# Altium PCB capbank.PcbDoc
Units mm, origin at the board's own origin, x right, y up, seen from the top; angles counter-clockwise.
Board outline 65 x 40 mm, 2 copper layers (Top Layer, Bottom Layer); 28 components, 20 nets, 75 pads, 23 vias.
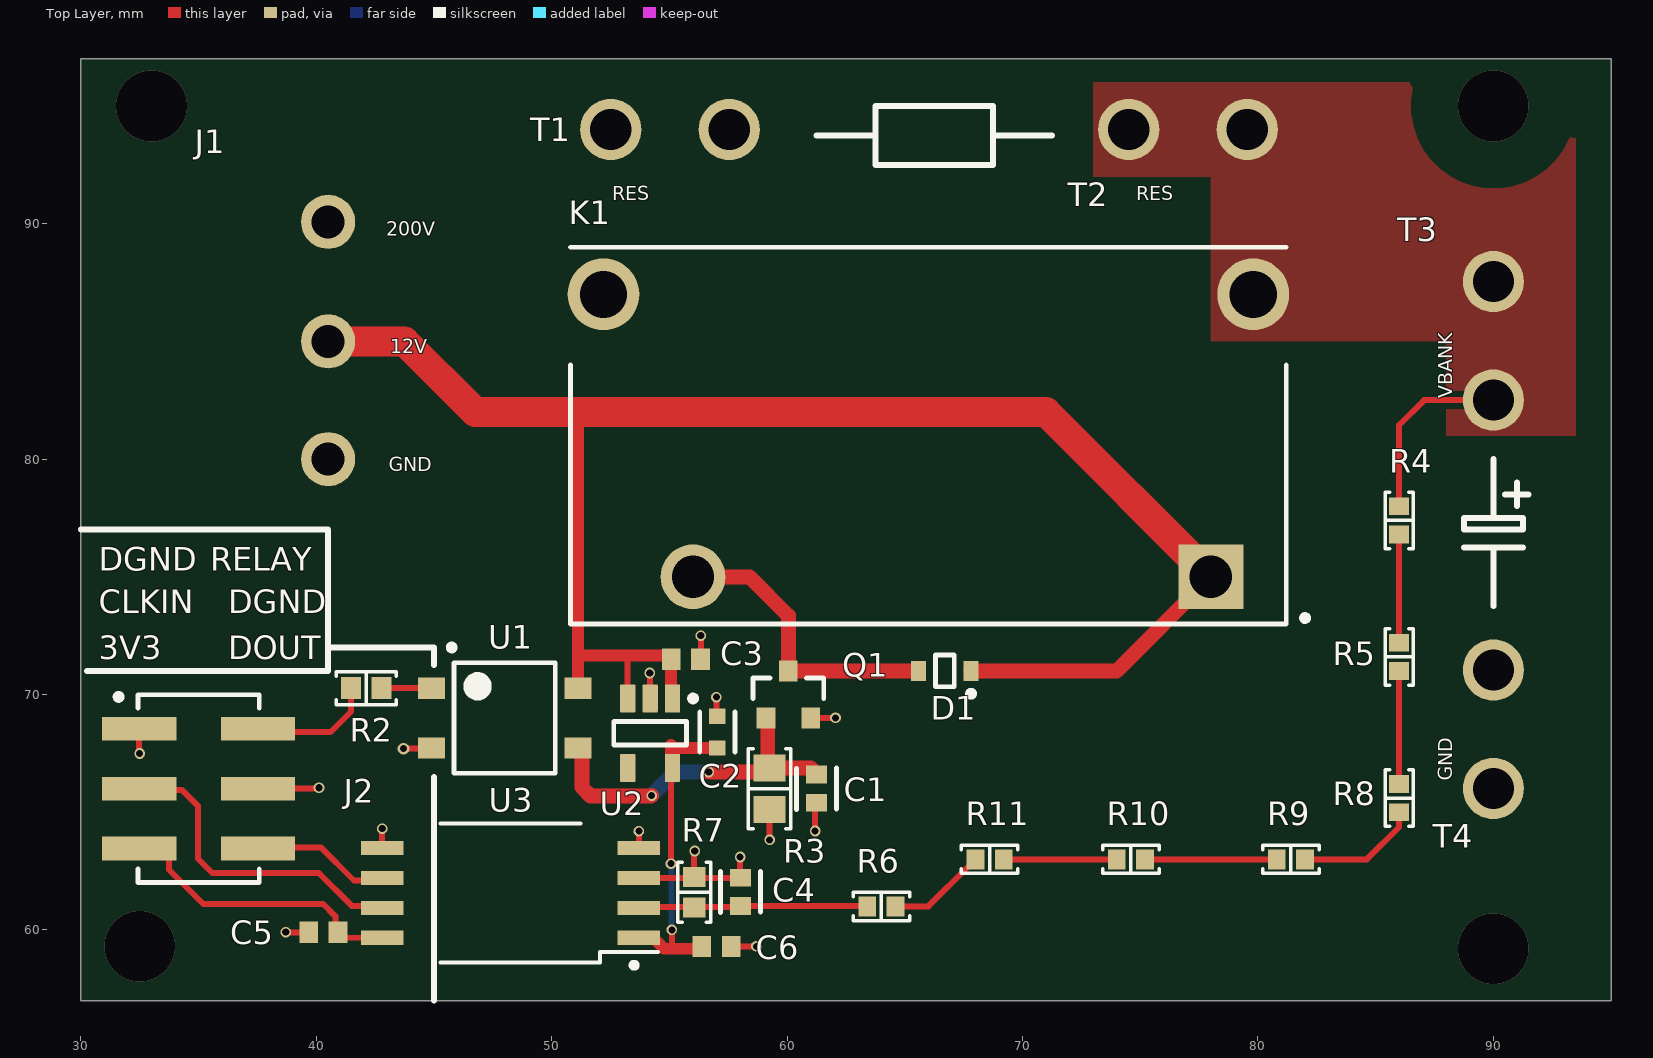
[diagram p0: Top Layer view]
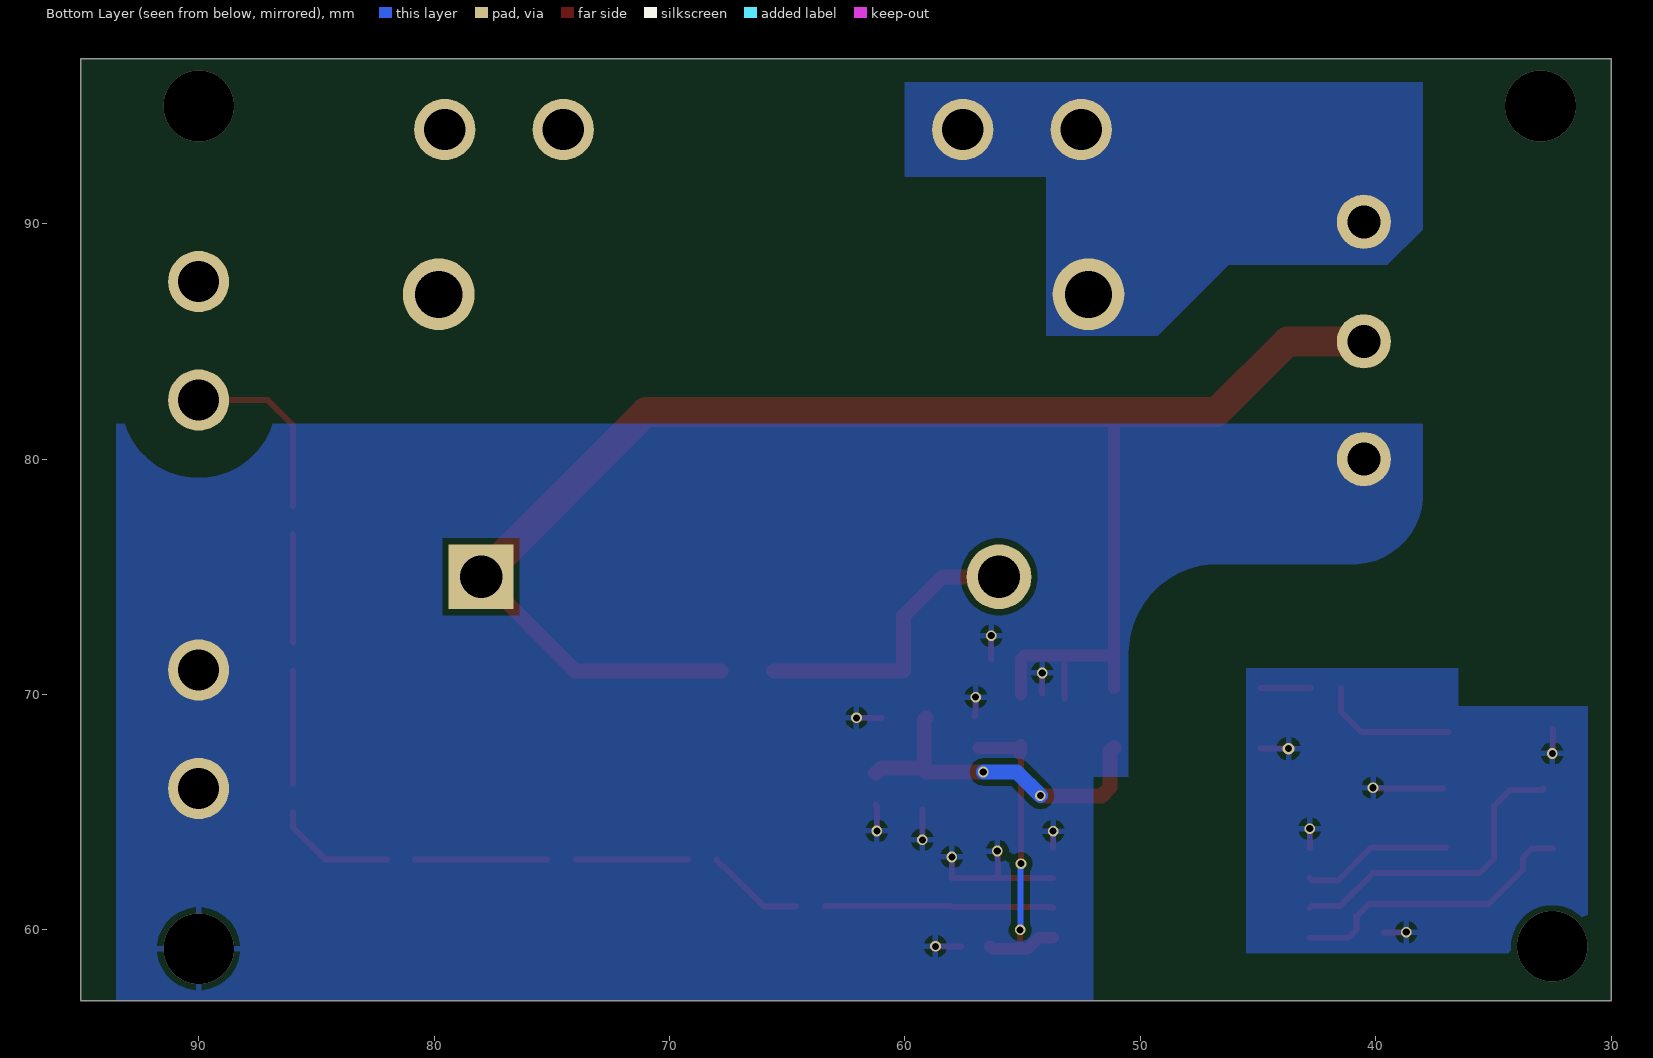
[diagram p1: Bottom Layer view, seen from below]
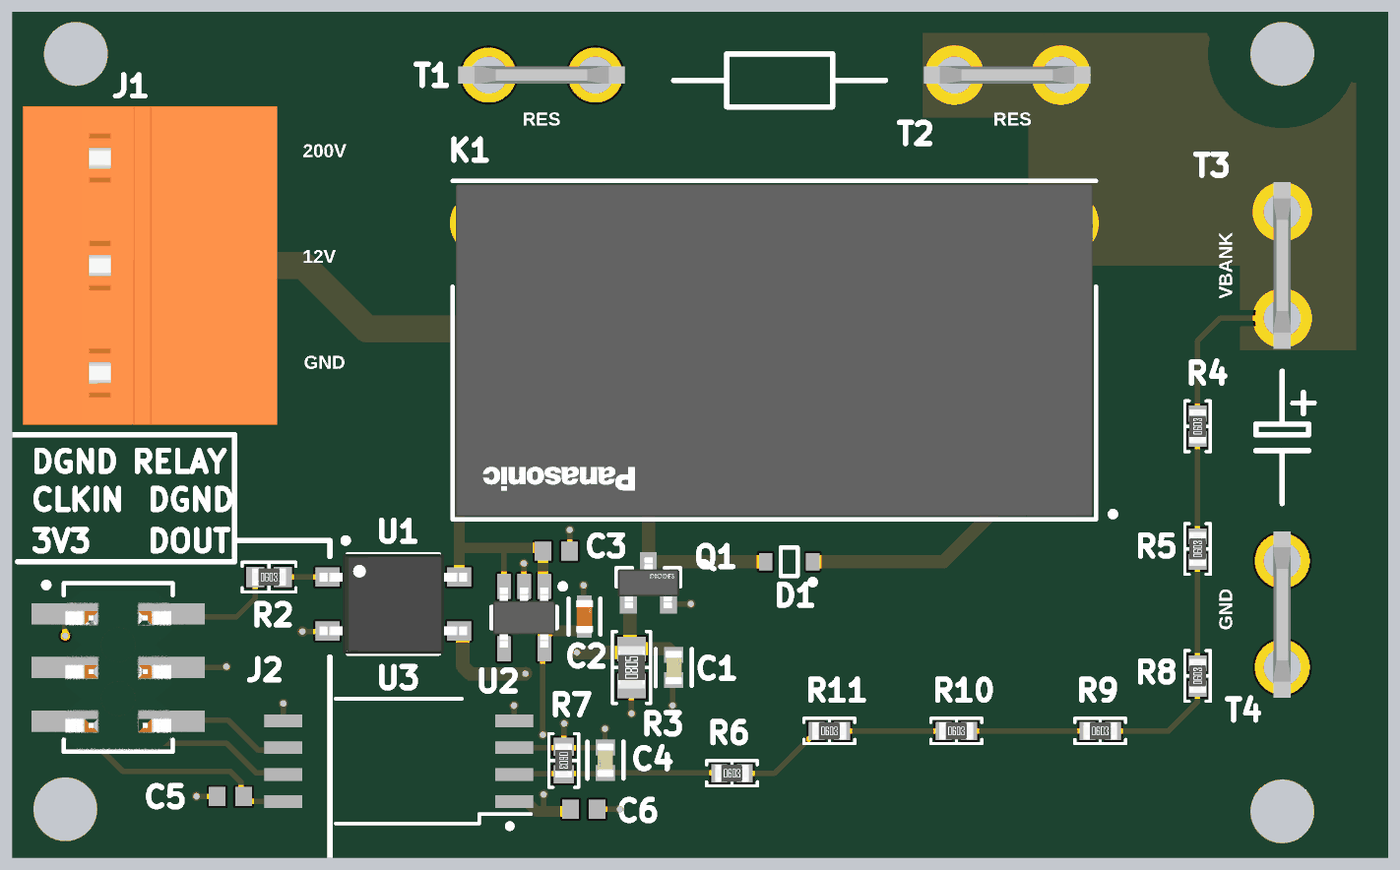
[diagram p2: 3D render of the assembled board from above, using the file's embedded part models]

## Layer stack, top to bottom
Top Solder: solder mask 0.0102, Solder Resist, Dk 3.5
Top Layer: signal copper 0.0356
Dielectric 1: dielectric 0.32, FR-4, Dk 4.8
Bottom Layer: signal copper 0.0356
Bottom Solder: solder mask 0.0102, Solder Resist, Dk 3.5

## Board outline
30,57 95,57 95,97 30,97

## Design rules (kind name [scope] priority, off if disabled: settings)
Clearance hv_clearance [InNetClass('HV') vs Not InNetClass('HV')] p1: gap=2 ignorepadtopadclearanceinfootprint=FALSE
Clearance [All] p2: gap=0.254 ignorepadtopadclearanceinfootprint=FALSE
PolygonConnect [All] p1: connectstyle=Relief reliefconductorwidth=0.254 reliefentries=4 polygonreliefangle="90 Angle" airgapwidth=0.254
RoutingVias [All] p1: holewidth=0.711 width=1.27 viastyle="Through Hole" minholewidth=0.3 minwidth=0.45 maxholewidth=0.711 maxwidth=1.27
SilkToSolderMaskClearance [IsPad] p1: minsilkscreentomaskgap=0.025 clearancetoexposedcopper=TRUE
SolderMaskExpansion [All] p1: expansion=0.102 istentingtop=FALSE
Width [All] p1: maxlimit=2.54 minlimit=0.254 preferedwidth=0.254
29 further rules are at their usual default settings.

## Classes and differential pairs
net class HV: +200 NetK1_3 NetR4_1 NetR5_1 NetR6_2 NetR8_1 NetR9_1 NetR10_1

## Components (designator, comment, footprint, x,y, rotation, side; value= is the part's Value field where it differs from the comment)
C1 "15nF C0G" FP-C0603C-CF-MFG 61.25,66 r270 top value="15,000 pF"
C2 "2.2uF" FP-GRM188-0_1-e0_2_0_5-MFG 57.032,68.407 r90 top
C3 "1uF" CAPC1608X87X35LL15T15 55.7,71.5 r180 top
C4 "15nF C0G" FP-C0603C-CF-MFG 58.019,61.618 r90 top value="15,000 pF"
C5 "1uF" CAPC1608X87X35LL15T15 40.3,59.9 r0 top
C6 "1uF" CAPC1608X87X35LL15T15 57,59.3 r180 top
D1 "BAT54HT1G" ONSC-SOD-323-2-477-02_V 66.7,71 r180 top
J1 "20A Socket 3Pin" weidmuller_3p_20A 40.5,85 r270 top
J2 "M20-8750342" FP-M20-8750342-MFG 35,66 r270 top
K1 "ALF1P12" FP-ALF1P12-MFG 66,81 r180 top
Q1 "DMN6140L-13" FP-SOT23-MFG 60.05,70 r90 top
R2 "510Ohm" "RES 0603_1608" 42.125,70.275 r0 top
R3 "12k" "RES 0805_2012" 59.25,66 r90 top value=1K
R4 "220k" "RES 0603_1608 RF" 86,77.4 r90 top
R5 "220k" "RES 0603_1608 RF" 86,71.6 r90 top
R6 "220k" "RES 0603_1608 RF" 64,61 r0 top
R7 "3.3k" "RES 0603_1608" 56.051,61.605 r270 top
R8 "220k" "RES 0603_1608 RF" 86,65.6 r90 top
R9 "220k" "RES 0603_1608 RF" 81.4,63 r0 top
R10 "220k" "RES 0603_1608 RF" 74.6,63 r0 top
R11 "220k" "RES 0603_1608 RF" 68.6,63 r0 top
T1 "pwr_connector_quick" pcb_quick_power_connector 55,94 r180 top
T2 "pwr_connector_quick" pcb_quick_power_connector 77,94 r180 top
T3 "pwr_connector_quick" pcb_quick_power_connector 90,85 r270 top
T4 "pwr_connector_quick" pcb_quick_power_connector 90,68.5 r270 top
U1 "SFH690BT" VISH-SOP-4_A_V 48,69 r0 top
U2 "TPS76150DBVR" DBV0005A_M 54.178,68.358 r270 top
U3 "AMC1336DWV" AMC1336 48,62 r180 top

## Footprints (in the part's own frame and the unit in brackets; to place one, negate y for a bottom-side part, rotate by r counter-clockwise, add the part's x,y. Pads: shape width x height; smd on the part's side, far side on the other; paste and mask are expansions set on the pad)
AMC1336 [mm]
  rect 1.8x0.6 smd paste+0 mask+0: 1(-5.704,2.332) 2(-5.704,1.062) 3(-5.704,-0.208) 4(-5.704,-1.478) 5(5.196,-1.478) 6(5.196,-0.208) 7(5.196,1.062) 8(5.196,2.332)
  silkscreen extent -6.5,-2.52 2.72,3.38, body extent -4,-2.5 3.5,3.4, height 1.54
CAPC1608X87X35LL15T15 [mm] "Chip Capacitor, 2-Leads, Body 1.60x0.80mm, IPC High Density"
  rect 0.8x0.9 smd: 1(-0.625,0) 2(0.625,0)
  body extent -0.87,-0.48 0.87,0.48, height 0.87
DBV0005A_M [mm] "SOT23, 5-Leads, Body 3.05x1.75mm, Pitch 0.95mm, IPC Low Density"
  rrect15% 1.2x0.65 smd: 1(-1.475,0.95) 2(-1.475,0) 3(-1.475,-0.95) 4(1.475,-0.95) 5(1.475,0.95)
  silkscreen extent -1.6,-1.55 0.5,1.95, body extent -1.42,-1.46 1.42,1.46, height 1.08
FP-ALF1P12-MFG [mm]
  rect 2.75x2.75 hole 1.8 paste-2539.97 mask+0: 1(-12,6)
  round 2.75 hole 1.8 paste-2539.97 mask+0: 2(10,6)
  round 3.05 hole 2 paste-2539.97 mask+0: 3(-13.8,-6) 4(13.8,-6)
  silkscreen extent -16.13,-8 15.2,8, body extent -15.43,-8.1 15.43,8.1, height 0.25
FP-C0603C-CF-MFG [mm]
  rect 0.75x0.9 smd paste+0 mask+0: 1(-0.6,0) 2(0.6,0)
  silkscreen extent -0.87,-0.85 0.88,0.85, body extent -1.2,-0.6 1.2,0.6, height 0.25
FP-GRM188-0_1-e0_2_0_5-MFG [mm]
  rect 0.65x0.7 smd paste+0 mask+0: 1(-0.675,0) 2(0.675,0)
  silkscreen extent -0.85,-0.75 0.85,0.75, body extent -1.1,-0.55 1.1,0.55, height 0.25
FP-M20-8750342-MFG [mm]
  rect 1x3.15 smd paste+0 mask+0: 1(-2.54,-2.525) 2(-2.54,2.525) 3(0,-2.525) 4(0,2.525) 5(2.54,-2.525) 6(2.54,2.525)
  silkscreen extent -4.02,-3.52 3.99,2.58, body extent -3.89,-4.2 4.29,4.2, height 0.25
FP-SOT23-MFG [mm]
  rect 0.9x0.8 smd paste+0 mask+0: 1(-1,0.95) 2(-1,-0.95) 3(1,0)
  silkscreen extent -0.18,-1.5 0.7,1.5, body extent -1.55,-1.6 1.55,1.6, height 0.25
ONSC-SOD-323-2-477-02_V [mm] "SOD, 2-Leads, Body 1.7x1.25mm"
  rect 0.63x0.83 smd: 1(-1.115,0) 2(1.115,0)
  silkscreen extent -1.24,-0.67 0.4,1.09, body extent -0.85,-0.63 0.85,0.63, height 1.06
pcb_quick_power_connector [mm]
  round 2.6 hole 1.75: 1(-2.543,0) 1(2.492,0)
  body extent -3.94,-0.41 3.94,0.41, height 10.28
"RES 0603_1608" [mm] "Chip Resistor, 2-Leads, Body 1.60x0.80mm, IPC Medium Density"
  rect 0.85x0.95 smd: 1(-0.65,0) 2(0.65,0)
  silkscreen extent -1.27,-0.7 1.27,0.7, body extent -0.8,-0.4 0.8,0.4, height 0.45
"RES 0603_1608 RF" [mm] "Chip Resistor, 2-Leads, Body 1.60x0.80mm, IPC High Density"
  rect 0.75x0.85 smd: 1(-0.6,0) 2(0.6,0)
  silkscreen extent -1.2,-0.6 1.2,0.6, body extent -0.8,-0.4 0.8,0.4, height 0.45
"RES 0805_2012" [mm] "Chip Resistor, 2-Leads, Body 2.00x1.25mm, IPC Medium Density"
  rect 1.15x1.35 smd: 1(-0.875,0) 2(0.875,0)
  silkscreen extent -1.7,-0.9 1.7,0.9, body extent -1,-0.62 1,0.63, height 0.6
VISH-SOP-4_A_V [mm] "SOP, 4-Leads, Body 4.8x4.7mm, Pitch 2.54mm"
  rect 1.14x0.91 smd: 1(-3.11,1.27) 2(-3.11,-1.27) 3(3.11,-1.27) 4(3.11,1.27)
  silkscreen extent -2.37,-2.35 2.15,3.12, body extent -3.48,-2.35 3.48,2.35, height 2.13
weidmuller_3p_20A [mm]
  round 2.3 hole 1.4: 1(5,0) 2(0,0) 3(-5.08,0)
  body extent -7.52,-10 7.52,2, height 9.63

## Part data
C1 C4: library part CMP-03020-015158-1, "C0603 15,000 pF C0G 30ppm/°C 20.00% 25 V", Capacitance="15,000 pF", Manufacturer=KEMET, Manufacturer Part Number=C0603C153M3GACTU, Package=C0603C-CF, Temperature="-55°C to +125°C", Temperature Characteristic=C0G, Temperature Coefficient=30ppm/°C, Temperature Range High=+125°C, Temperature Range Low=-55°C, Tolerance=0.2, Voltage Rating="25 V", Automotive=Yes, Automotive Grade="Grade 1", Category=Cap, ComponentLink2Description=Datasheet, ComponentLink2URL=https://api.kemet.com/component-edge/download/datasheet/C0603C100J5GACAUTO.pdf, Device Class L1="Passive Components", Device Class L2=Capacitors, Device Class L3="Ceramic Capacitors", Height=0.87mm, Lead Free=Yes, Material=Ceramic, Mouser Description="Multilayer Ceramic Capacitors MLCC - SMD/SMT 25volts 0.015uF 20% C0G", Octopart=https://octopart.com/c0603c153m3gactu-kemet-104967330, RoHS=TRUE
C2: library part CMP-2006-02836-2, "Chip Multilayer Ceramic Capacitors for General Purpose, 0603, 2.2uF, X7R, 15%, 10%, 10V", Case Code (Imperial)=0603, Case Code (Metric)=1608, Dielectric=X7R, Max Operating Temperature=125°C, Min Operating Temperature=-55°C, Package Quantity=1, Tolerance=10%, Voltage=10V, Capacitance=2.2uF, Case/Package=0603, Depth=0.8mm, Height=0.8mm, Lead Free="Lead Free", Length=1.6mm, Material=Ceramic, Mount="Surface Mount", Number of Pins=2, Packaging="Cut Tape", REACH SVHC="No SVHC", Termination=SMD/SMT, Thickness=0.035inch, Voltage Rating=10V, Voltage Rating (DC)=10V, Weight=7.1E-05oz, Width=0.031inch
C3 C5 C6: library part CMP-2006-03713-1, Manufacturer=Kemet, Part Number=C0603C105K3RACTU
D1: library part CMP-1055-00462-1, "Schottky Barrier Diode, 2-Pin SOD-323, Pb-Free, Tape and Reel", Manufacturer="On Semiconductor", ComponentLink1Description="Manufacturer URL", ComponentLink1URL=http://www.onsemi.com/, ComponentLink2Description=Datasheet, ComponentLink2URL=http://www.onsemi.cn/pub_link/Collateral/BAT54HT1-D.PDF, ComponentLink3Description="Package Specification", ComponentLink3URL=http://www.onsemi.com/pub_link/Collateral/477-02.PDF.1, Configuration=Single, DatasheetVersion="Rev. 6", IFSM Max (A)=0.6, Mounting Technology="Surface Mount", PackageDescription="2-Pin SOD, Body 1.7 x 1.25 mm", PackageReference=SOD-323-2-477-02, PackageVersion="Rev. H, 03/2007", Packing="Tape and Reel", PartNumber=BAT54HT1G, RoHS=TRUE, trr Max (ns)=5
J1: library part wuerth_connector_straight_30_20A_691311500103, Supplier Part Number 1=1722945, Supplier 1=Rs
J2: library part CMP-15831-000025-1, "CONN HEADER SMD 6POS 2.54MM", Current Rating=3A, Flammability Rating="UL94 V-0", Insulation Color=Black, Max Operating Temperature=105°C, Min Operating Temperature=-40°C, Connector Type="Male Pin", Contact Material=Brass, Contact Plating=Gold, Contact Shape=Square, Fastening Type=Push, Insulation Material=Nylon, Mount="Surface Mount", Number of Positions=6, Number of Rows=2, Packaging=Rail/Tube, Termination=Solder
K1: library part CMP-05607-000098-1, "RELAY GEN PURPOSE SPST 20A 12V", Coil Current=75mA, Coil Power=900mW, Coil Resistance=160R, Coil Voltage (DC)=12V, Contact Current Rating=25A, Max Operating Temperature=60°C, Max Voltage Rating (AC)=250V, Min Operating Temperature=-40°C, Package Quantity=50, Ratings=IP67, Switching Capacity=6.25kW, Switching Current=20A, Test Voltage=5kV, Coil Type=Non-Latching, Contact Material=Tin, Depth=15.7mm, Height=23.3mm, Lead Free="Lead Free", Length=30.1mm, Max Current Rating=25A, Mount="Through Hole", Number of Pins=4, Number of Poles=1, Operate Time=15ms, Packaging=Box, Power Consumption=900mW, Power Rating=900mW, Radiation Hardening=No, Relay Type="General Purpose", Release Time=15ms, RoHS Compliant=Yes, Termination="PC Pin", Throw Configuration=SPST, Voltage Rating (AC)=250V, Weight=23g, Width=15.7mm
Q1: library part CMP-12801-000047-1, "MOSFET N-CH 60V 1.6A SOT23", Continuous Drain Current=1.6A, Drain To Source Breakdown Voltage=60V, Drain To Source Resistance=92mΩ, Gate To Source Voltage=20V, Input Capacitace At Vds="315pF @ 40V", Manufacturer="Diodes Inc.", Max Forward Diode Voltage=1V, Max Junction Temp=+150°C, Package=SOT23, Power Dissipation=0.7W, Pulse Drain Current=10A, Temperature="-55°C to +150°C", Temperature Range Low=-55°C, Typ Forward Diode Voltage=0.75V, Automotive=No, Category=Trans, ComponentLink2Description=Datasheet, ComponentLink2URL=https://www.diodes.com/assets/Datasheets/DMN6140L.pdf, Depletion Mode=False, Device Class L1="Discrete Semiconductors", Device Class L2=Transistors, Device Class L3=MOSFETs, Digikey Description="MOSFET N-CH 60V 1.6A SOT23", Drain To Source Voltage=60V, Footprint Url=https://www.diodes.com/assets/Package-Files/SOT23.pdf, Gate Charge At Vgs="8.6nC @ 10V", Height=1.1mm, Lead Free=Yes, Manufacturer Part Number=DMN6140L-13, Mouser Description="MOSFET 31V to 99V N-Ch FET 60Vds 20Vgs 2.3A", Number of Channels=1, Number Of N Channels=1, Octopart=https://octopart.com/dmn6140l-13-diodes+inc.-38898616, Reverse Recovery Charge=9nC, Reverse Recovery Time=16.8ns, RoHS=TRUE, Rthja Max=183°C/W, Standoff Height=0.013mm, Temperature Range High=+150°C, Threshold Vgs Max=3V, Threshold Vgs Min=1V, Turn Off Delay Time=16.3ns, Turn On Delay Time=2.6ns
R2 R7: library part Resistor, "SMT Resistor"
R3: library part Res1, "Resistor", LatestRevisionDate=17-Jul-2002, LatestRevisionNote="Re-released for DXP Platform.", PackageDescription="Axial Device, Thru-Hole; 2 Leads; 0.3 in Pin Spacing", PackageReference=AXIAL-0.3, Published=8-Jun-2000, Publisher="Altium Limited"
R4 R5 R6 R8 R9 R10 R11: library part Resistor, "SMT Resistor", Supplier Part Number 1=9238760, Supplier 1=Farnell
T1 T2 T3 T4: Supplier Part Number 1=WM2984CT-ND, Supplier 1=Digi-Key
U1: library part CMP-2000-07046-1, "Optocoupler Phototransistor Output, 6 V, 50 mA, -55 to 100 degC, 4-Pin SOIC, RoHS, Tape and Reel", Collector Current (DC)=0.1A, Collector-Emitter Saturation Voltage=0.3V, Collector-Emitter Voltage=70V, Current Transfer Ratio=300%, Forward Current=50mA, Forward Voltage=1.4V, Isolation Voltage=3750V, Manufacturer=Vishay, Operating Temp Range=-55Cto100C, Operating Temperature Classification=Industrial, Package Description="4-Pin Small Outline Package Integrated Circuit, Body 4.575 x 4.42 mm, Pitch 2.54 mm", Package Reference=SOP-4, Package Type=SOP, Power Dissipation=0.15W, Reverse Breakdown Voltage=6V, Collector Current (DC) (Max)=0.1A, Datasheet URL=http://www.vishay.com/docs/83686/sfh690ab.pdf, Datasheet Version="Rev. 2.6, 11/2015", DELETED=Compliant, Input Type=DC, Manufacturer URL=http://www.vishay.com/, Mounting=SurfaceMount, Mounting Technology=SurfaceMount, Number of  Elements=1, Output Device=Transistor, Output Type=DC, Packaging=TapeandReel, Pin Count=4, Rad Hardened=No
U2: library part CMP-0394-00730-2, "Single Output LDO, 100 mA, Fixed 5 V Output, 5.38 to 16 V Input, with Low IQ, 5-pin SOT-23 (DBV), -40 to 125 degC, Green (RoHS & no Sb/Br)", Manufacturer="Texas Instruments", Accuracy(%)=2, Code_JEDEC=MO-178, ComponentLink1Description="Manufacturer URL", ComponentLink1URL=http://www.ti.com/, ComponentLink2Description=Datasheet, ComponentLink2URL=http://www.ti.com/general/docs/lit/getliterature.tsp?genericPartNumber=TPS76150&fileType=pdf, ComponentLink3Description="Package Specification", ComponentLink3URL=http://www.ti.com/litv/pdf/mpds018i, DatasheetVersion=SLVS178B, Eco-Plan="Green (RoHS & no Sb/Br)", Fixed Output Options(V)=5, Iout(Max)(A)=0.1, Iq(Typ)(mA)=2.6, Mounting Technology="Surface Mount", PackageDescription="5-Pin Plastic Small Outline, Body 1.60 Ãƒâ€” 2.90 mm, Pitch 0.95 mm", PackageReference=DBV0005A, PackageVersion=4073253-4/K, PartNumber=TPS76150DBVR, SubFamily="Single Channel LDO", Vdo(Typ)(mV)=170, Vin(Max)(V)=16, Vin(Min)(V)=5.38, Vout Adj(Max)(V)=5, Vout Adj(Min)(V)=5
U3: "&plusmn;1-V input, precision voltage sensing reinforced isolated modulator 8-SOIC -40 to 125", Manufacturer_Name="Texas Instruments", Copyright="Copyright (C) 2025 Ultra Librarian. All rights reserved.", Datasheet=https://www.ti.com/lit/gpn/amc1336, Manufacturer_Part_Number=AMC1336DWV, RefDes=RefDes, Type=TYPE

## Via types
v1: diameter 0.45, hole 0.3, Top Layer to Bottom Layer, tented both sides, 17 vias
v2: diameter 3, hole 3, Top Layer to Bottom Layer, tented both sides, 4 vias
v3: diameter 0.45, hole 0.3, Top Layer to Bottom Layer, 1 vias
v4: diameter 0.5, hole 0.3, Top Layer to Bottom Layer, tented both sides, 1 vias

## Nets (pads, with @x,y where several pads share a name; then routed paths per layer and width w, separated by ;. In a path a pad name is that pad's centre, name@x,y a point inside that pad or via, vN(x,y) a via of type N, cw(c..) or ccw(c..) an arc to the next point about the centre after c; other vN are vias at no path point)
+3.3: C5.2 J2.5 U3.8 | length 12.5
  Top Layer w0.254: J2.5 33.371,63.46 33.744,63.087 33.744,62.557 35.2,61.1 40.291,61.1 40.809,60.582 40.809,60.016 41.157,59.668 U3.8
+5: C2.1 C6.2 U2.5 U3.1 | length 13.4
  Top Layer w0.254: v1(55.065,62.819) 55.065,67.409 55.129,67.474 U2.5@55.132,67.474 ; 55.1,59.2 v1(55.1,60)
  Top Layer w0.508: U3.1 54.304,59.668 54.772,59.2 55.1,59.2 56.275,59.2 C6.2 ; 55.075,67.85 55.075,67.735 ; U2.5@55.132,67.474 55.075,67.531 55.075,67.735 ; C2.1@56.883,67.725 55.085,67.725 55.075,67.735
  Bottom Layer w0.254: v1(55.065,62.819) 55.083,62.802 55.083,60.017 v1(55.1,60)
+12: C3.2 D1.1 J1.2 K1.1 U1.4 U2.1 U2.3 | length 72.6
  Top Layer w0.254: 53.201,71.565 53.228,71.538 U2.3
  Top Layer w0.508: 51,82 51.11,81.89 51.11,71.6 ; U1.4 51.11,71.6 ; U2.1@55.075,70 C3.2 55.075,71.503 54.929,71.649 51.159,71.649 51.11,71.6
  Top Layer w0.635: D1.1 74,71 K1.1
  Top Layer w1.27: J1.2 43.75,85 46.75,82 51,82 71,82 K1.1
+200: J1.3 K1.4 T1.1
CLKIN: J2.3 U3.7 | length 13.3
  Top Layer w0.254: J2.3@32.865,66 32.911,65.954 34.282,65.954 34.967,65.269 34.967,63.033 35.582,62.418 40.11,62.418 41.505,61.023 42.719,61.023 U3.7
DGND: C5.1 J2.1 J2.4 U1.2 U3.5 | length 7.1
  Top Layer w0.254: J2.1 32.475,67.518 v3(32.497,67.496) ; J2.4@37.135,66 40.073,66 v1(40.113,66.04) ; v1(38.7,59.91) 38.71,59.9 C5.1 ; v1(42.8,64.3) 42.8,63.482 U3.5 ; v4(43.7,67.7) 44.86,67.7 U1.2
DOUT: J2.6 U3.6 | length 6.4
  Top Layer w0.254: J2.6@37.017,63.509 40.191,63.509 41.6,62.1 42.696,62.1 U3.6
GND: C1.2 C2.2 C3.1 C4.2 C6.1 J1.1 Q1.2 R3.1 R7.1 T4.1 U2.2 U3.3 U3.4 | length 14.3
  Top Layer w0.254: v1(53.7,64.2) 53.7,63.482 U3.4 ; U3.3 53.709,62.213 58.014,62.213 C4.2 58,62.237 v1(58,63.1) ; U2.2@54.163,70.038 54.171,70.046 54.171,70.908 v1(54.163,70.916) ; R7.1 56.051,63.328 v1(56.075,63.352) ; C3.1 56.331,71.506 v1(56.331,72.502) ; v1(56.99,69.886) 56.99,69.124 C2.2 ; C6.1 v1(58.7,59.3) ; R3.1 59.25,63.831 v1(59.255,63.826) ; Q1.2 62.049,69 v1(62.054,69.005) ; v1(61.191,64.204) 61.191,65.266 C1.2@61.25,65.325
  other v2: 90,59.2
NetC1_1: C1.1 Q1.1 R3.2 U1.3 | length 14.6
  Top Layer w0.635: U1.3 51.141,67.73 51.278,67.592 51.278,66.063 51.65,65.691 54.225,65.691 v1(54.24,65.707) ; v1(56.669,66.71) 59.085,66.71 R3.2 ; Q1.1 59.175,68.925 59.175,66.95 R3.2 ; C1.1@61.25,66.675 61.2,66.675 61,66.875 R3.2
  Bottom Layer w0.635: v1(54.24,65.707) 55.244,66.71 v1(56.669,66.71)
NetC4_1: C4.1 R6.1 R7.2 U3.2 | length 9.7
  Top Layer w0.254: U3.2 53.744,60.978 57.979,60.978 C4.1 63.382,61.018 R6.1
NetD1_2: D1.2 K1.2 Q1.3 | length 12.6
  Top Layer w0.635: K1.2 58.4,75 60.05,73.35 Q1.3 D1.2
NetK1_3: K1.3 R4.2 T2.1 T3.1 | length 7.9
  Top Layer w0.254: R4.2 86,81.45 87.058,82.508 T3.1@90,82.508
NetR2_2: R2.2 U1.1 | length 2.1
  Top Layer w0.254: R2.2 42.78,70.27 U1.1
NetR4_1: R4.1 R5.2 | length 4.6
  Top Layer w0.254: R5.2 R4.1
NetR5_1: R5.1 R8.2 | length 4.8
  Top Layer w0.254: R8.2 R5.1
NetR6_2: R6.2 R11.1 | length 4.3
  Top Layer w0.254: R6.2 66,61 67.702,62.702 67.752,62.702 68,62.95 R11.1
NetR8_1: R8.1 R9.2 | length 5.2
  Top Layer w0.254: R9.2 84.625,63 86,64.375 R8.1
NetR9_1: R9.1 R10.2 | length 5.6
  Top Layer w0.254: R10.2 R9.1
NetR10_1: R10.1 R11.2 | length 4.8
  Top Layer w0.254: R11.2 R10.1
RELAY: J2.2 R2.1 | length 5.9
  Top Layer w0.254: J2.2@36.898,68.402 40.602,68.402 41.475,69.275 R2.1
pads on no net: U2.4
copper on no net:
  other v2: 32.5,59.3 33,95 90,95

## Polygon pours and split planes (outlines as drawn)
DGND on Bottom Layer "DGND_L02_P001" (solid, pour order 1): 45.5,71.115 45.5,59 31,59 31,69.5 36.5,69.5 36.5,71.115
GND on Bottom Layer "GND_L02_P000" (solid, pour order 0): 38,81.5 93.5,81.5 93.5,57 52,57 52,66.5 50.5,66.5 50.5,71.75 ccw(c46.709,71.75) 46.709,75.541 40.959,75.541 cw(c40.959,78.5) 38,78.5
+200 on Bottom Layer "+200_L02_P002" (solid, pour order 2): 38,96 60,96 60,92 54,92 54,88.25 54,85.25 49.25,85.25 46.25,88.25 39.5,88.25 38,89.75
NetK1_3 on Top Layer "NETK1_3_L01_P003" (solid, pour order 3): 73,96 73,92 78,92 78,85 88,85 88,81 93.5,81 93.5,96

## Silkscreen, mask and mechanical layers (free items; w line width, h text height)
Top Overlay:
  circle w0.254: c53.5,58.5 r0.106
  lines w0.254: 30,77 40.5,77 40.5,73.5 40.5,71 30.25,71 ; 40.5,71.25 40.5,72 45,72 45,71.25 ; 45,57 45,66.5 ; 61.25,93.75 63.75,93.75 ; 71.25,93.75 68.75,93.75 ; 88.75,76.25 91.25,76.25 ; 90,73.75 90,76.25 ; 90,77.5 90,80 ; 90.5,78.5 91.5,78.5 ; 91,78 91,79 ; 63.75,93.75 63.75,92.5 68.75,92.5 68.75,93.75 ; 63.75,93.75 63.75,95 68.75,95 68.75,93.75 ; 88.75,77 88.75,77.5 91.25,77.5 91.25,77 88.75,77
  text "RES" at 52.58,90.8 h1
  text "RES" at 74.83,90.8 h1
  text "200V" at 42.964,89.3 h1
  text "12V" at 43.138,84.3 h1
  text "VBANK" at 88.45,82.58 h1 r90
  text "GND" at 43.077,79.3 h1
  text "DGND" at 30.754,75.254 h1
  text "RELAY" at 35.504,75.254 h1
  text "CLKIN" at 30.754,73.454 h1
  text "DGND" at 36.254,73.454 h1
  text "3V3" at 30.754,71.504 h1
  text "DOUT" at 36.254,71.504 h1
  text "GND" at 88.45,66.33 h1 r90
Board Outline:
  lines w0.254: 30,57 33,57 93.5,57 93.5,97 30,97 30,57